# Altium PCB PCB_PLC_Khanh.PcbDoc
Units mm, origin at the board's own origin, x right, y up, seen from the top; angles counter-clockwise.
Board outline 123 x 88 mm, 2 copper layers (Top Layer, Bottom Layer); 168 components, 154 nets, 553 pads, 0 vias.
Unrouted connection lines stored in the file: 311.
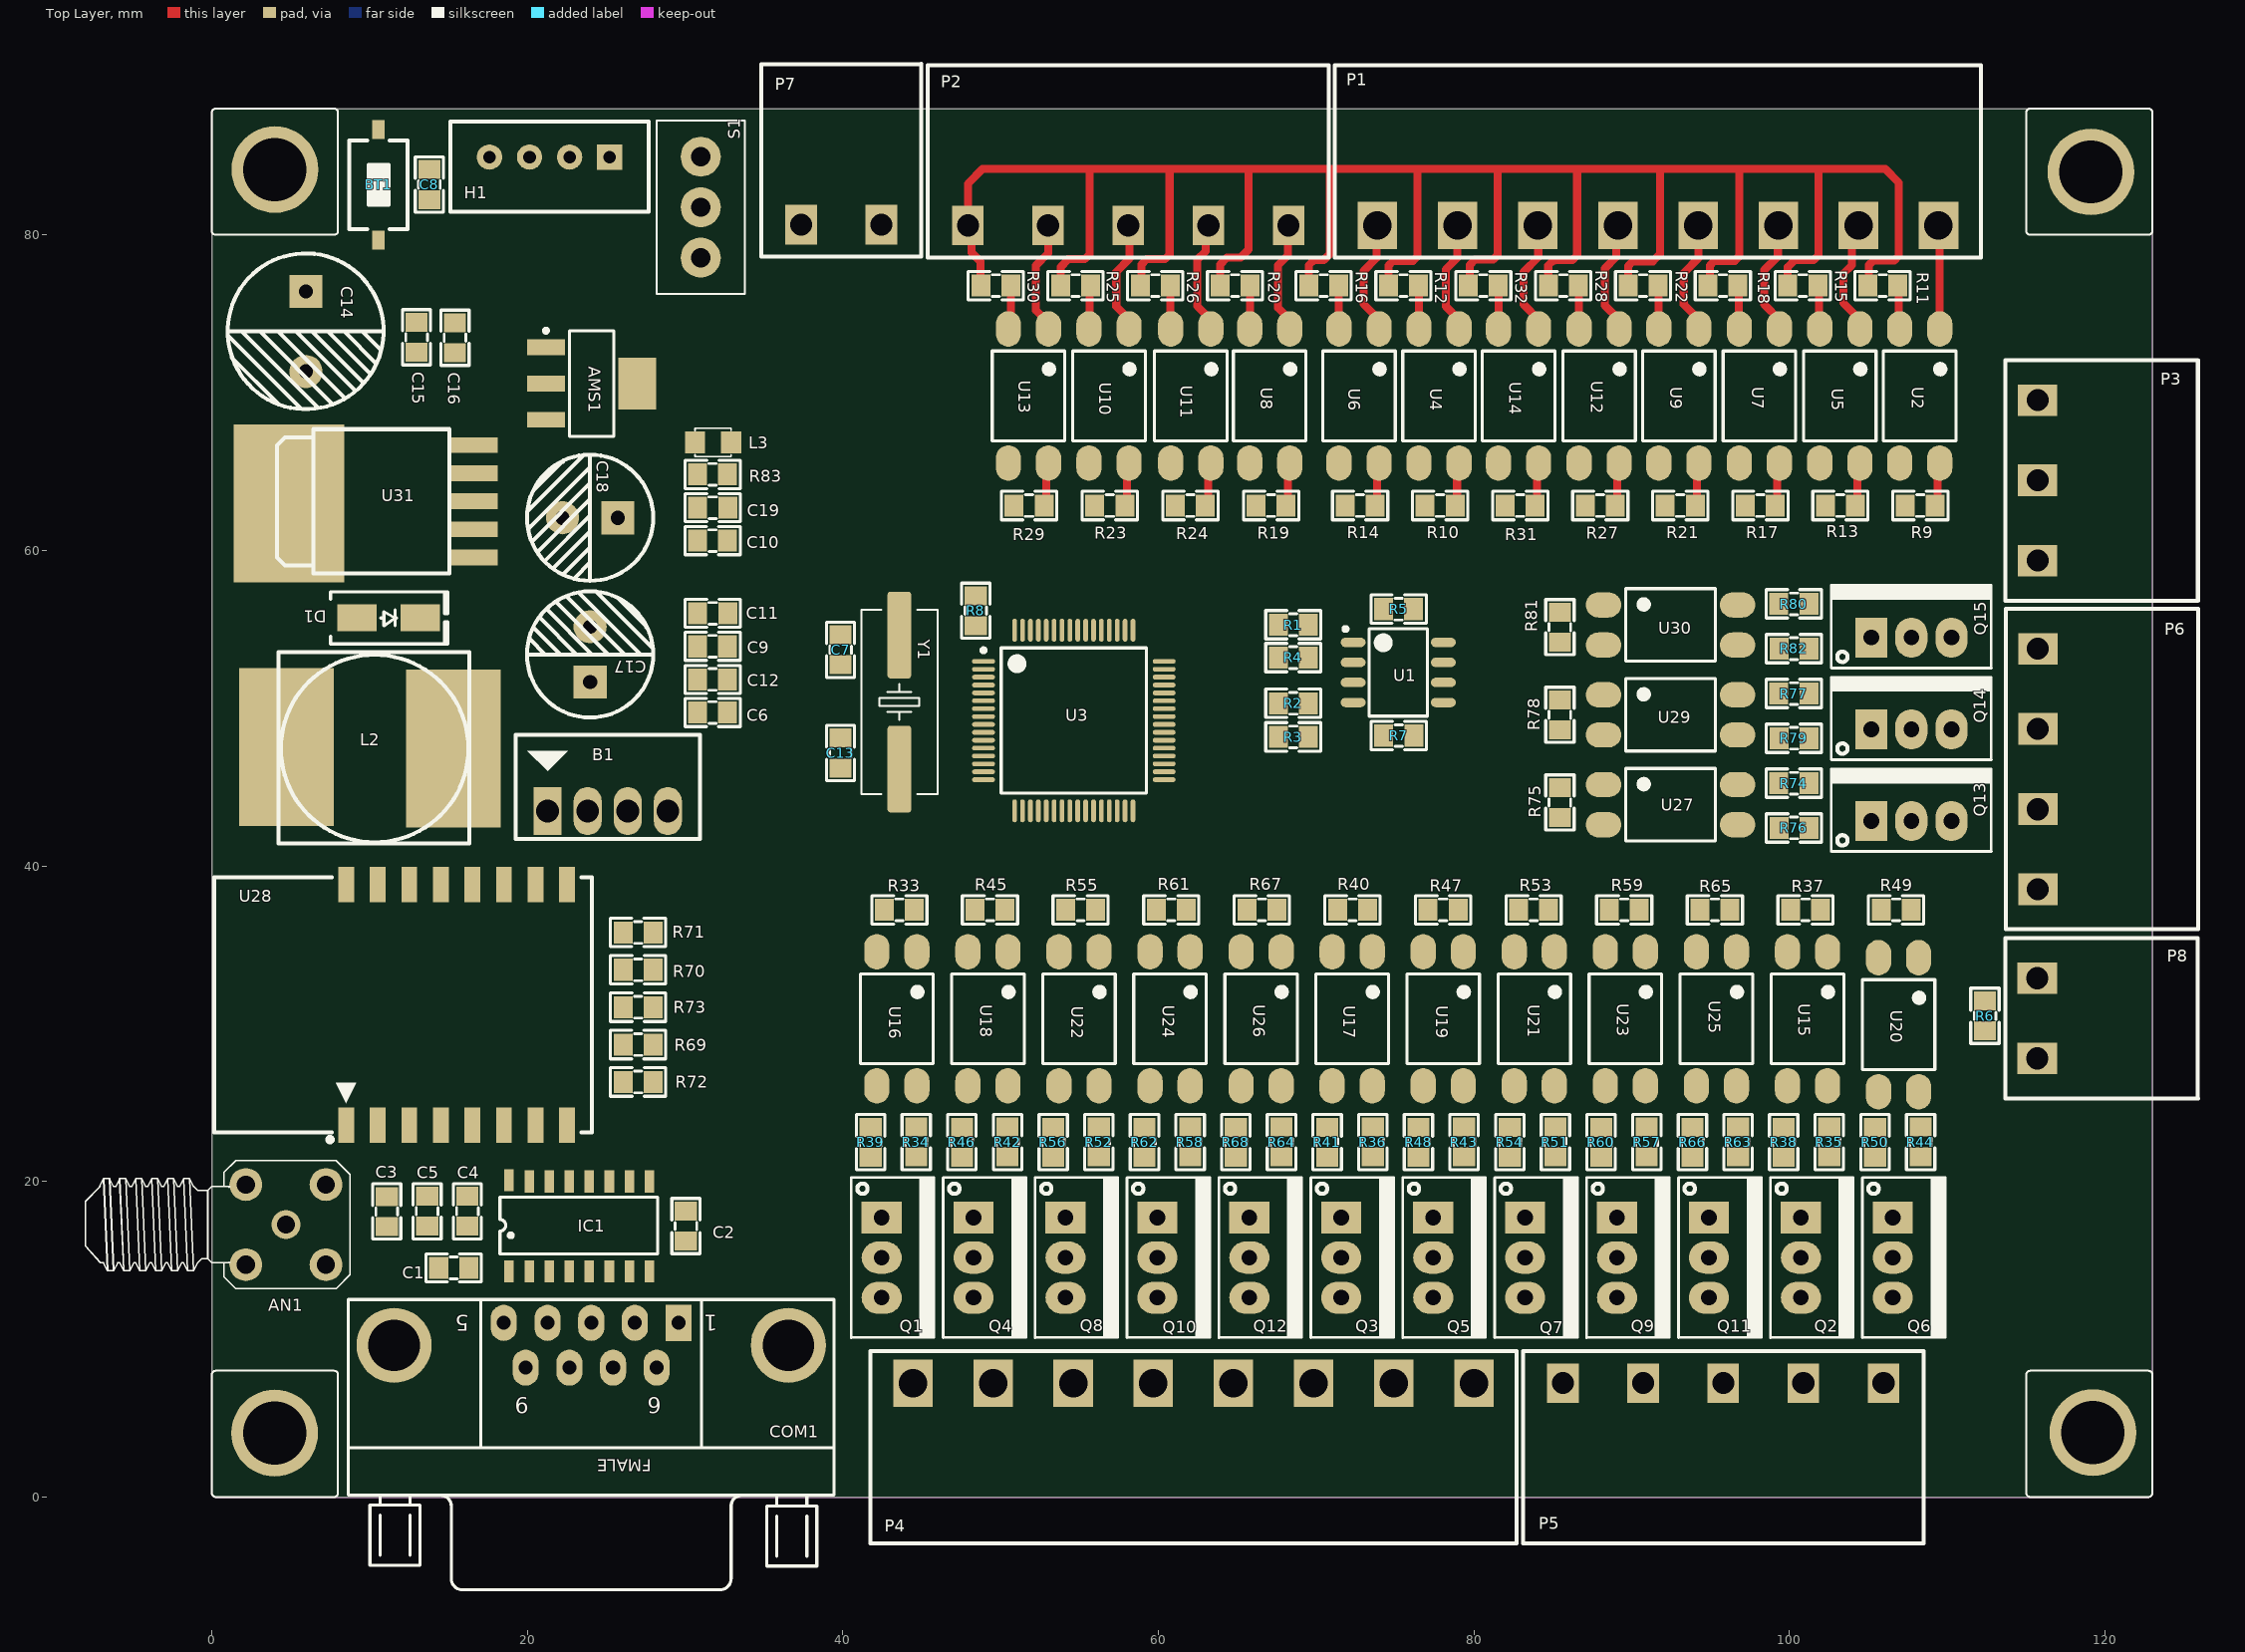
[diagram p0: Top Layer view]
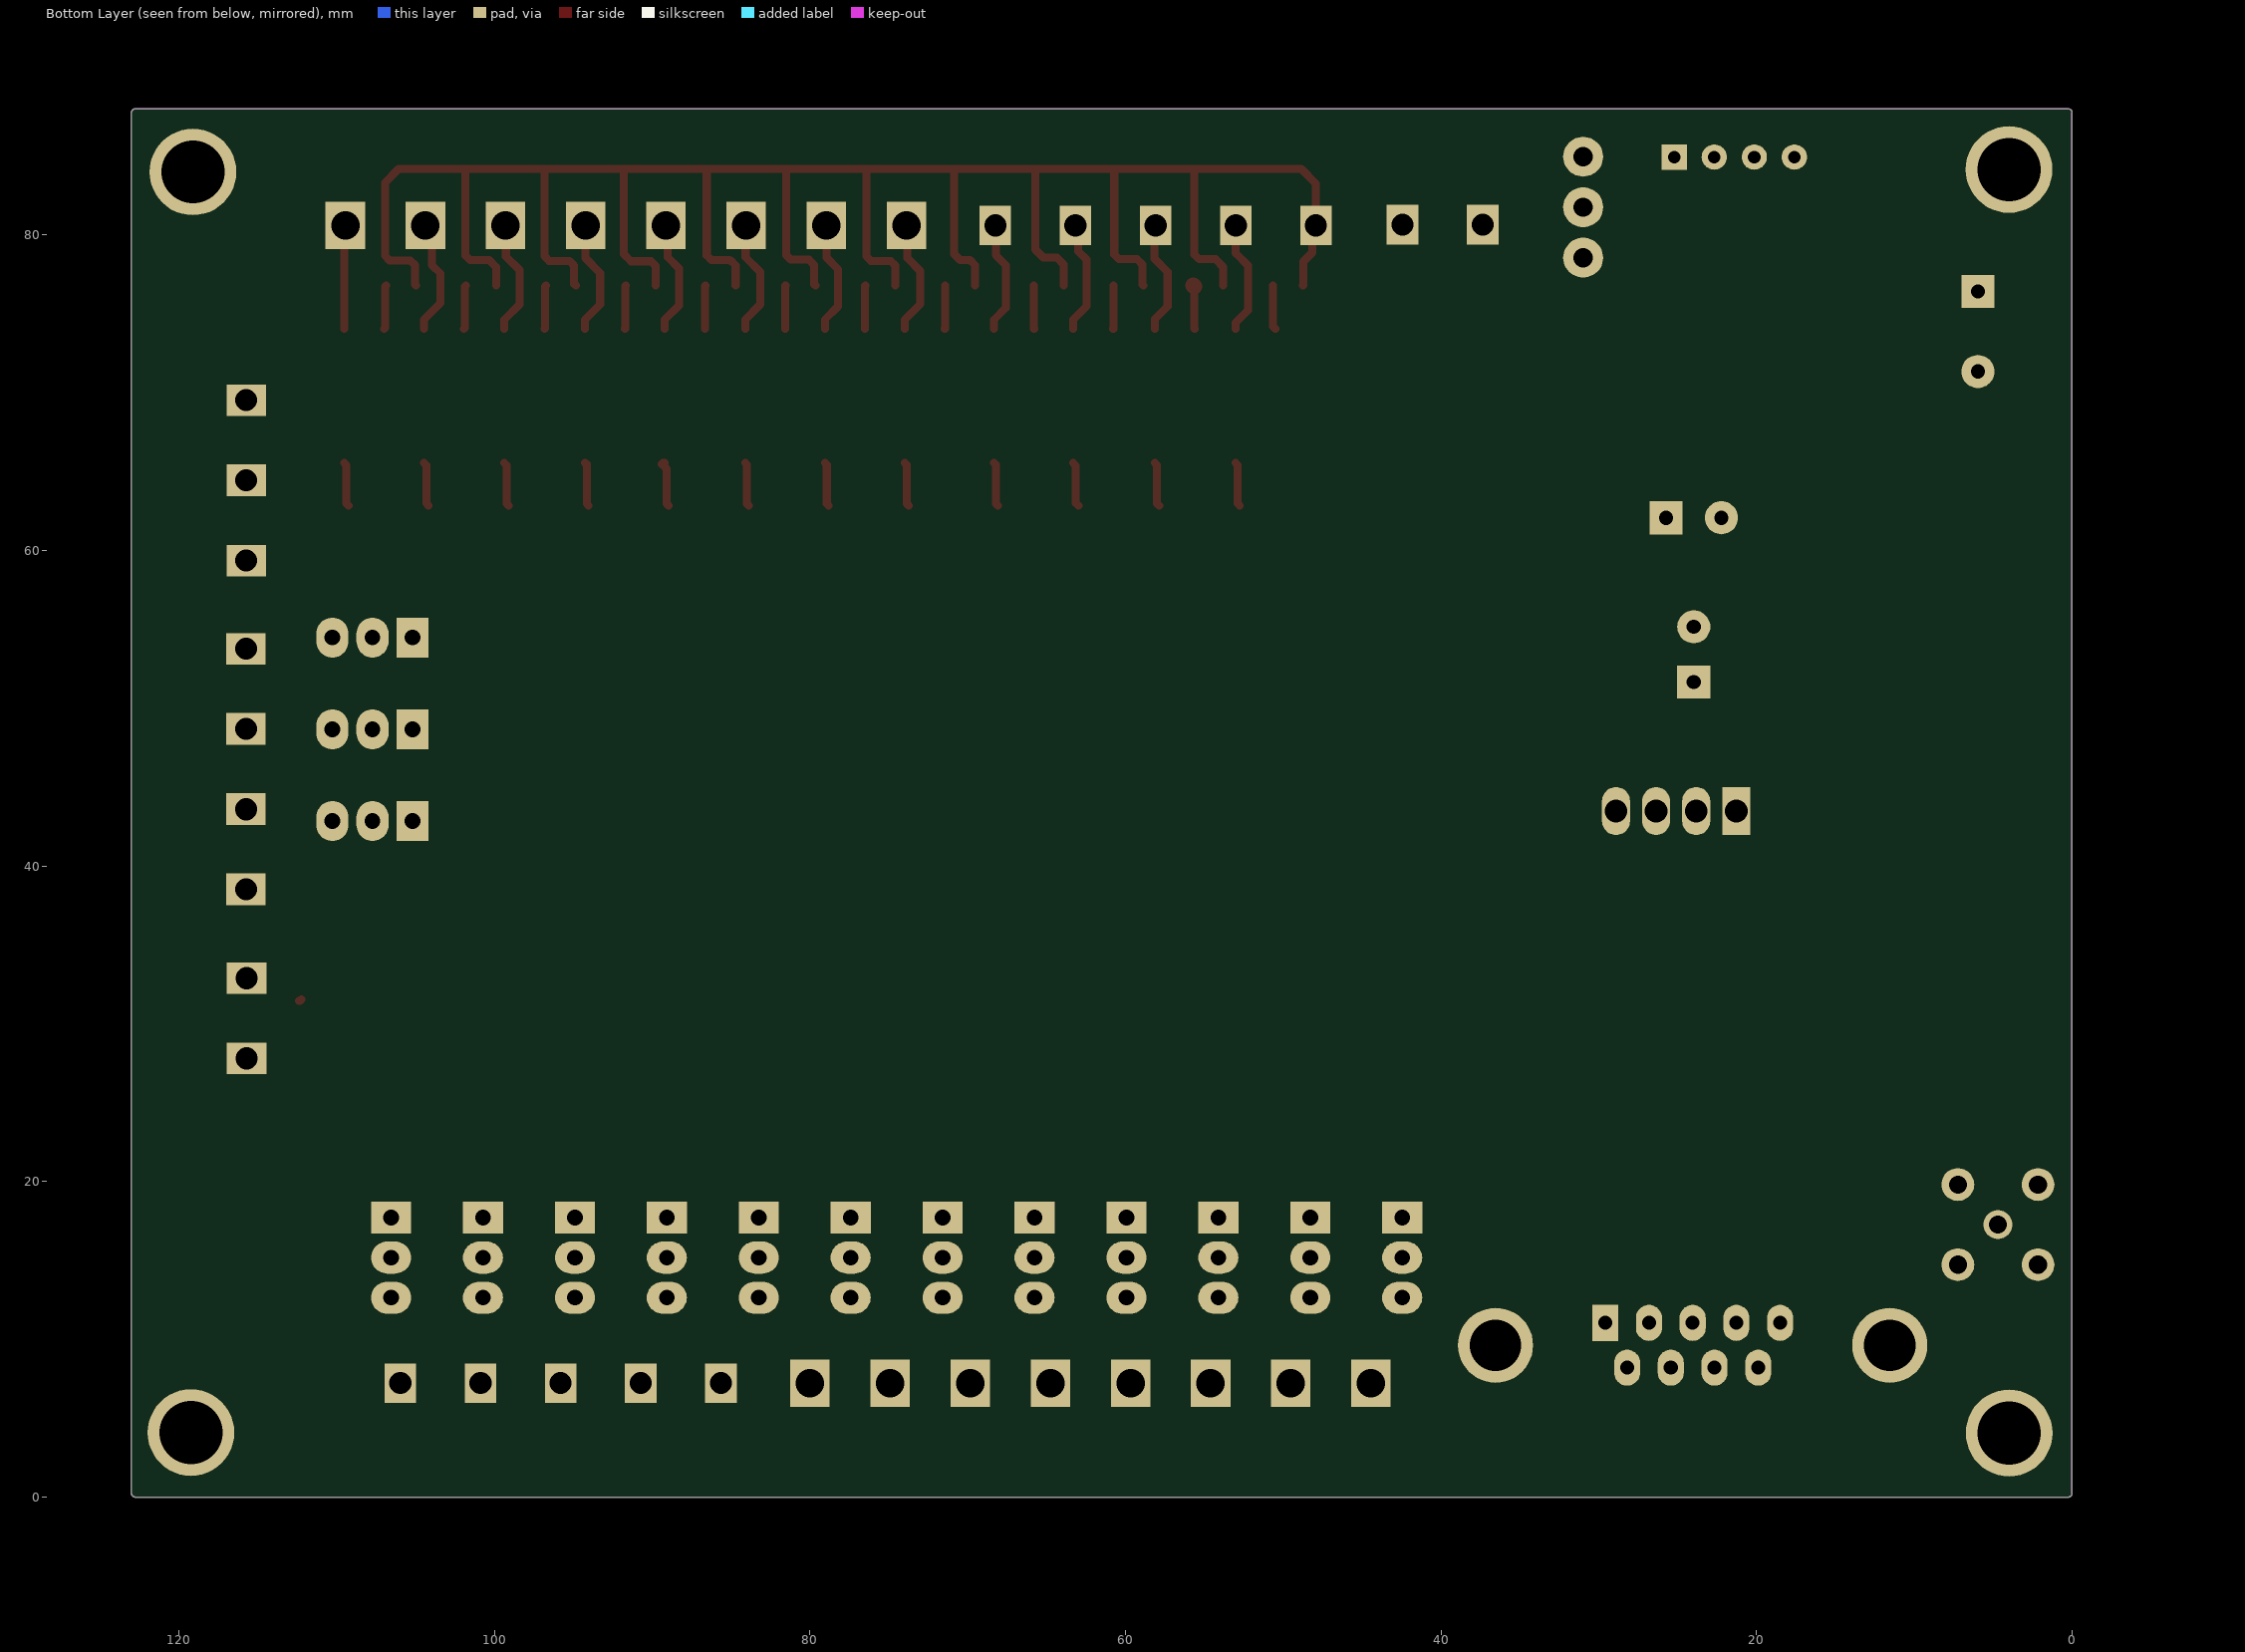
[diagram p1: Bottom Layer view, seen from below]

## Layer stack, top to bottom
Top Solder: solder mask 0.0102, Solder Resist, Dk 3.5
Top Layer: signal copper 0.0356
Dielectric 1: dielectric 0.32, FR-4, Dk 4.8
Bottom Layer: signal copper 0.0356
Bottom Solder: solder mask 0.0102, Solder Resist, Dk 3.5

## Board outline
0,0.254 0,87.746 cw(c0.254,87.746) 0.254,88 122.746,88 cw(c122.746,87.746) 123,87.746 123,0.254 cw(c122.746,0.254) 122.746,0 0.254,0 cw(c0.254,0.254)

## Design rules (kind name [scope] priority, off if disabled: settings)
Clearance [All] p1: gap=0.254 ignorepadtopadclearanceinfootprint=FALSE except(0: Arc-Hole Track-Hole SMDPad-Hole THPad-Hole Via-Hole Fill-Hole Poly-Hole Region-Hole Text-Hole)
PolygonConnect [All] p1: connectstyle=Relief reliefconductorwidth=0.254 reliefentries=4 polygonreliefangle="90 Angle" airgapwidth=0.254
RoomDefinition U_WIFI [InComponentClass('U_WIFI')] p1: confinementstyle=ConfineIn formatcopy=TRUE lockcomponents=FALSE outline -41.478,-32.36 9.322,-32.36 9.322,-6.96 -41.478,-6.96
RoomDefinition U_RS485 [InComponentClass('U_RS485')] p2: confinementstyle=ConfineIn formatcopy=TRUE lockcomponents=FALSE outline -41.478,-32.36 9.322,-32.36 9.322,-6.96 -41.478,-6.96
RoomDefinition U_RS232 [InComponentClass('U_RS232')] p3: confinementstyle=ConfineIn formatcopy=TRUE lockcomponents=FALSE outline -41.478,-32.36 9.322,-32.36 9.322,-6.96 -41.478,-6.96
RoomDefinition U_PWM_Output [InComponentClass('U_PWM_Output')] p4: confinementstyle=ConfineIn formatcopy=TRUE lockcomponents=FALSE outline -41.478,-32.36 9.322,-32.36 9.322,-6.96 -41.478,-6.96
RoomDefinition U_Power [InComponentClass('U_Power')] p5: confinementstyle=ConfineIn formatcopy=TRUE lockcomponents=FALSE outline -41.478,-32.36 9.322,-32.36 9.322,-6.96 -41.478,-6.96
RoomDefinition U_D_Output [InComponentClass('U_D_Output')] p6: confinementstyle=ConfineIn formatcopy=TRUE lockcomponents=FALSE outline -41.478,-32.36 9.322,-32.36 9.322,-6.96 -41.478,-6.96
RoomDefinition U_D_Input [InComponentClass('U_D_Input')] p7: confinementstyle=ConfineIn formatcopy=TRUE lockcomponents=FALSE outline -41.478,-32.36 9.322,-32.36 9.322,-6.96 -41.478,-6.96
RoomDefinition U_A_Input [InComponentClass('U_A_Input')] p8: confinementstyle=ConfineIn formatcopy=TRUE lockcomponents=FALSE outline -41.478,-32.36 9.322,-32.36 9.322,-6.96 -41.478,-6.96
RoomDefinition SCH_PLC_Khanh [InComponentClass('SCH_PLC_Khanh')] p9: confinementstyle=ConfineIn formatcopy=TRUE lockcomponents=FALSE outline -41.478,-32.36 9.322,-32.36 9.322,-6.96 -41.478,-6.96
RoutingVias [All] p1: holewidth=0.381 width=0.762 viastyle="Through Hole" minholewidth=0.254 minwidth=0.508 maxholewidth=0.711 maxwidth=1.27
SolderMaskExpansion [All] p1: expansion=0.102 istentingtop=FALSE
Width [All] p1: maxlimit=1.016 minlimit=0.254 preferedwidth=0.508
30 further rules are at their usual default settings.

## Classes and differential pairs
component class U_WIFI: AN1 R69 R70 R71 R72 R73 U28
component class U_RS485: C6 P8 R1 R2 R3 R4 R5 R6 R7 U1
component class U_RS232: C1 C2 C3 C4 C5 COM1 IC1
component class U_PWM_Output: P6 Q13 Q14 Q15 R74 R75 R76 R77 R78 R79 R80 R81 R82 U27 U29 U30
component class U_Power: AMS1 B1 C14 C15 C16 C17 C18 C19 D1 L2 L3 P7 R83 S1 U31
component class U_D_Output: P4 P5 Q1 Q2 Q3 Q4 Q5 Q6 Q7 Q8 Q9 Q10 Q11 Q12 R33 R34 R35 R36 R37 R38 R39 R40 R41 R42 R43 R44 R45 R46 R47 R48 R49 R50 R51 R52 R53 R54 R55 R56 R57 R58 R59 R60 R61 R62 R63 R64 R65 R66 R67 R68 U15 U16 U17 U18 U19 U20 U21 U22 U23 U24 U25 U26
component class U_D_Input: P1 P2 R9 R10 R11 R12 R13 R14 R15 R16 R17 R18 R19 R20 R21 R22 R23 R24 R25 R26 R27 R28 R29 R30 R31 R32 U2 U4 U5 U6 U7 U8 U9 U10 U11 U12 U13 U14
component class U_A_Input: P3
component class SCH_PLC_Khanh: BT1 C7 C8 C9 C10 C11 C12 C13 H1 R8 U3 Y1

## Components (designator, comment, footprint, x,y, rotation, side; value= is the part's Value field where it differs from the comment)
AMS1 "AMS1117-3.3V" SOT223 24.079,70.587 r270 top value="AMS1117-3.3V SOT223"
AN1 "ANTENA" "DE ANTEN SMA CONG" 4.699,17.272 r270 top
B1 "B0505S" B0505S 21.285,43.485 r0 top
BT1 "Nut Nhan 2 Chan SMD 3x6x2.5" "Nut Nhan 2 Chan SMD 3x6x2.5" 10.566,83.185 r270 top
C1 "104" "tu 0805" 15.336,14.525 r180 top
C2 "104" "tu 0805" 30.052,17.185 r270 top
C3 "104" "tu 0805" 11.096,18.115 r270 top
C4 "104" "tu 0805" 16.198,18.115 r90 top
C5 "104" "tu 0805" 13.647,18.115 r90 top
C6 "104" "tu 0805" 31.744,49.73 r180 top
C7 "22pF" "tu 0805" 39.849,53.701 r90 top
C8 "104" "tu 0805" 13.789,83.191 r90 top
C9 "104" "tu 0805" 31.744,53.924 r180 top
C10 "104" "tu 0805" 31.744,60.627 r180 top
C11 "104" "tu 0805" 31.744,56.021 r0 top
C12 "104" "tu 0805" 31.744,51.827 r180 top
C13 "22pF" "tu 0805" 39.849,47.168 r270 top
C14 "470uF" "tu hoa 10mm" 5.969,73.889 r270 top
C15 "104" "tu 0805" 12.976,73.513 r90 top
C16 "104" "tu 0805" 15.414,73.488 r90 top
C17 "470uF" "tu hoa 8mm" 23.978,53.414 r90 top
C18 "470uF" "tu hoa 8mm" 23.978,62.078 r180 top
C19 "104" "tu 0805" 31.744,62.719 r0 top
COM1 "COM 9 FMALE" "DSB 9-F" 24.048,9.625 r180 top value="COM 9"
D1 "SS34" "DIODE SMA" 11.208,55.728 r0 top
H1 "Header 4P 2.54 Duc Thang" XH2.54M-4 25.222,84.938 r180 top
IC1 "MAX232" SO-G16 23.292,17.154 r0 top
L2 "100uH - 3A SMD" "Cuon Cam 12x12x10" 16.324,41.449 r90 top
L3 "LED 0805" LED-0805-Orange 30.628,66.853 r0 top
P1 "CON 8 EDG5.08" "CON 8 8EDG5.08" 91.664,80.601 r0 top
P2 "CON 5 EDG5.08" "CON 5 5EDG5.08" 47.925,80.601 r0 top
P3 "CON 3 EDG5.08" "CON 3 3EDG5.08" 115.722,69.532 r270 top
P4 "CON 8 EDG5.08" "CON 8 8EDG5.08" 62.217,7.231 r180 top
P5 "CON 5 EDG5.08" "CON 5 5EDG5.08" 105.956,7.231 r180 top
P6 "CON 4 EDG5.08" "CON 4 4EDG5.08" 115.735,53.772 r270 top
P7 "CON 2 EDG5.08" "CON 2 2EDG5.08" 37.359,80.652 r0 top
P8 "CON 2 EDG5.08" "CON 2 2EDG5.08" 115.697,32.893 r270 top
Q1 "IRFZ44" TO220 42.458,17.721 r270 top
Q2 "IRFZ44" TO220 100.719,17.721 r270 top
Q3 "IRFZ44" TO220 71.588,17.721 r270 top
Q4 "IRFZ44" TO220 48.284,17.721 r270 top
Q5 "IRFZ44" TO220 77.414,17.721 r270 top
Q6 "IRFZ44" TO220 106.545,17.721 r270 top
Q7 "IRFZ44" TO220 83.241,17.721 r270 top
Q8 "IRFZ44" TO220 54.11,17.721 r270 top
Q9 "IRFZ44" TO220 89.067,17.721 r270 top
Q10 "IRFZ44" TO220 59.936,17.721 r270 top
Q11 "IRFZ44" TO220 94.893,17.721 r270 top
Q12 "IRFZ44" TO220 65.762,17.721 r270 top
Q13 "IRFZ44" TO220 105.181,42.85 r0 top
Q14 "IRFZ44" TO220 105.181,48.666 r0 top
Q15 "IRFZ44" TO220 105.181,54.483 r0 top
R1 "10k" "tro smd 0805" 68.549,55.235 r180 top
R2 "10k" "tro smd 0805" 68.549,50.257 r180 top
R3 "10k" "tro smd 0805" 68.549,48.123 r180 top
R4 "10k" "tro smd 0805" 68.549,53.152 r180 top
R5 "20k" "tro smd 0805" 75.224,56.226 r180 top
R6 "120R" "tro smd 0805" 112.446,30.505 r270 top
R7 "20k" "tro smd 0805" 75.235,48.209 r180 top
R8 "220R" "tro smd 0805" 48.362,56.185 r90 top
R9 "10k" "tro smd 0805" 108.295,62.785 r180 top
R10 "10k" "tro smd 0805" 77.858,62.785 r180 top
R11 "10k" "tro smd 0805" 105.899,76.852 r0 top
R12 "10k" "tro smd 0805" 75.527,76.852 r0 top
R13 "10k" "tro smd 0805" 103.222,62.785 r180 top
R14 "10k" "tro smd 0805" 72.786,62.785 r180 top
R15 "10k" "tro smd 0805" 100.837,76.852 r0 top
R16 "10k" "tro smd 0805" 70.466,76.852 r0 top
R17 "10k" "tro smd 0805" 98.149,62.785 r180 top
R18 "10k" "tro smd 0805" 95.775,76.852 r0 top
R19 "10k" "tro smd 0805" 67.147,62.785 r180 top
R20 "10k" "tro smd 0805" 64.852,76.852 r0 top
R21 "10k" "tro smd 0805" 93.077,62.785 r180 top
R22 "10k" "tro smd 0805" 90.713,76.852 r0 top
R23 "10k" "tro smd 0805" 56.919,62.785 r180 top
R24 "10k" "tro smd 0805" 62.033,62.785 r180 top
R25 "10k" "tro smd 0805" 54.743,76.852 r0 top
R26 "10k" "tro smd 0805" 59.798,76.852 r0 top
R27 "10k" "tro smd 0805" 88.004,62.785 r180 top
R28 "10k" "tro smd 0805" 85.651,76.852 r0 top
R29 "10k" "tro smd 0805" 51.805,62.785 r180 top
R30 "10k" "tro smd 0805" 49.688,76.852 r0 top
R31 "10k" "tro smd 0805" 82.931,62.785 r180 top
R32 "10k" "tro smd 0805" 80.589,76.852 r0 top
R33 "680R" "tro smd 0805" 43.581,37.285 r0 top
R34 "10k" "tro smd 0805" 44.584,22.502 r90 top
R35 "10k" "tro smd 0805" 102.456,22.502 r90 top
R36 "10k" "tro smd 0805" 73.525,22.502 r90 top
R37 "680R" "tro smd 0805" 101.008,37.285 r0 top
R38 "100R" "tro smd 0805" 99.689,22.502 r270 top
R39 "100R" "tro smd 0805" 41.817,22.502 r270 top
R40 "680R" "tro smd 0805" 72.295,37.285 r0 top
R41 "100R" "tro smd 0805" 70.758,22.502 r270 top
R42 "10k" "tro smd 0805" 50.372,22.502 r90 top
R43 "10k" "tro smd 0805" 79.313,22.502 r90 top
R44 "10k" "tro smd 0805" 108.244,22.502 r90 top
R45 "680R" "tro smd 0805" 49.324,37.285 r0 top
R46 "100R" "tro smd 0805" 47.605,22.502 r270 top
R47 "680R" "tro smd 0805" 78.037,37.285 r0 top
R48 "100R" "tro smd 0805" 76.546,22.502 r270 top
R49 "680R" "tro smd 0805" 106.751,37.285 r0 top
R50 "100R" "tro smd 0805" 105.477,22.502 r270 top
R51 "10k" "tro smd 0805" 85.101,22.502 r90 top
R52 "10k" "tro smd 0805" 56.16,22.502 r90 top
R53 "680R" "tro smd 0805" 83.78,37.285 r0 top
R54 "100R" "tro smd 0805" 82.334,22.502 r270 top
R55 "680R" "tro smd 0805" 55.066,37.285 r0 top
R56 "100R" "tro smd 0805" 53.393,22.502 r270 top
R57 "10k" "tro smd 0805" 90.889,22.502 r90 top
R58 "10k" "tro smd 0805" 61.948,22.502 r90 top
R59 "680R" "tro smd 0805" 89.523,37.285 r0 top
R60 "100R" "tro smd 0805" 88.122,22.502 r270 top
R61 "680R" "tro smd 0805" 60.809,37.285 r0 top
R62 "100R" "tro smd 0805" 59.181,22.502 r270 top
R63 "10k" "tro smd 0805" 96.677,22.502 r90 top
R64 "10k" "tro smd 0805" 67.736,22.502 r90 top
R65 "680R" "tro smd 0805" 95.265,37.285 r0 top
R66 "100R" "tro smd 0805" 93.91,22.502 r270 top
R67 "680R" "tro smd 0805" 66.552,37.285 r0 top
R68 "100R" "tro smd 0805" 64.969,22.502 r270 top
R69 "10k" "tro smd 0805" 27.02,28.618 r180 top
R70 "10k" "tro smd 0805" 27.02,33.485 r0 top
R71 "10k" "tro smd 0805" 27.02,35.728 r180 top
R72 "10k" "tro smd 0805" 27.02,26.375 r0 top
R73 "10k" "tro smd 0805" 27.02,31.115 r0 top
R74 "10k" "tro smd 0805" 100.279,45.193 r180 top
R75 "680R" "tro smd 0805" 85.385,44.029 r90 top
R76 "100R" "tro smd 0805" 100.279,42.479 r0 top
R77 "10k" "tro smd 0805" 100.279,50.874 r180 top
R78 "680R" "tro smd 0805" 85.385,49.586 r90 top
R79 "100R" "tro smd 0805" 100.279,48.16 r0 top
R80 "10k" "tro smd 0805" 100.279,56.556 r180 top
R81 "680R" "tro smd 0805" 85.385,55.143 r90 top
R82 "100R" "tro smd 0805" 100.279,53.842 r0 top
R83 "220R" "tro smd 0805" 31.742,64.887 r0 top
S1 "ON-ON" SWITCH_SPDT_SLIDER 30.988,81.761 r270 top
U1 "max485_smd" SO8W_N 75.26,52.273 r0 top
U2 "OPTO PC817 SMD" SOP4 108.25,69.798 r270 top value=PC817
U3 "STM32F103xx_LQFP64" STM32_LQFP64 54.635,49.225 r0 top
U4 "OPTO PC817 SMD" SOP4 77.781,69.798 r270 top value=PC817
U5 "OPTO PC817 SMD" SOP4 103.188,69.798 r270 top value=PC817
U6 "OPTO PC817 SMD" SOP4 72.715,69.798 r270 top value=PC817
U7 "OPTO PC817 SMD" SOP4 98.09,69.798 r270 top value=PC817
U8 "OPTO PC817 SMD" SOP4 67.051,69.798 r270 top value=PC817
U9 "OPTO PC817 SMD" SOP4 92.985,69.798 r270 top value=PC817
U10 "OPTO PC817 SMD" SOP4 56.866,69.798 r270 top value=PC817
U11 "OPTO PC817 SMD" SOP4 62.047,69.798 r270 top value=PC817
U12 "OPTO PC817 SMD" SOP4 87.93,69.798 r270 top value=PC817
U13 "OPTO PC817 SMD" SOP4 51.76,69.798 r270 top value=PC817
U14 "OPTO PC817 SMD" SOP4 82.825,69.798 r270 top value=PC817
U15 "OPTO PC817 SMD" SOP4 101.138,30.319 r270 top value=PC817
U16 "OPTO PC817 SMD" SOP4 43.422,30.319 r270 top value=PC817
U17 "OPTO PC817 SMD" SOP4 72.28,30.319 r270 top value=PC817
U18 "OPTO PC817 SMD" SOP4 49.193,30.319 r270 top value=PC817
U19 "OPTO PC817 SMD" SOP4 78.051,30.319 r270 top value=PC817
U20 "OPTO PC817 SMD" SOP4 106.909,29.947 r270 top value=PC817
U21 "OPTO PC817 SMD" SOP4 83.823,30.319 r270 top value=PC817
U22 "OPTO PC817 SMD" SOP4 54.965,30.319 r270 top value=PC817
U23 "OPTO PC817 SMD" SOP4 89.594,30.319 r270 top value=PC817
U24 "OPTO PC817 SMD" SOP4 60.736,30.319 r270 top value=PC817
U25 "OPTO PC817 SMD" SOP4 95.366,30.319 r270 top value=PC817
U26 "OPTO PC817 SMD" SOP4 66.508,30.319 r270 top value=PC817
U27 "OPTO PC817 SMD" SOP4 92.456,43.891 r0 top value=PC817
U28 "ESP 07" "ESP8266 07" 8.516,23.212 r90 top
U29 "OPTO PC817 SMD" SOP4 92.456,49.587 r0 top value=PC817
U30 "OPTO PC817 SMD" SOP4 92.456,55.283 r0 top value=PC817
U31 "LM2576HVS 5.0V SMD" TO263-5 10.744,63.119 r90 top
Y1 "8Mhz" "Thach Anh 2 chan SMD" 43.581,50.395 r90 top value=4Mhz

## Footprints (in the part's own frame and the unit in brackets; to place one, negate y for a bottom-side part, rotate by r counter-clockwise, add the part's x,y. Pads: shape width x height; smd on the part's side, far side on the other; paste and mask are expansions set on the pad)
B0505S [mil]
  rect 70x120 hole 57: 1(0,0)
  oval 70x120 hole 57: 2(100,0) 3(200,0) 4(300,0)
  silkscreen extent -80,-70 380,190, body extent -76,-50 376,186, height 394
"CON 2 2EDG5.08" [mm]
  rect 2x2.5 hole 1.4: 1(0,0) 2(5.08,0)
  silkscreen extent -2.54,-2.03 7.62,10.21, body extent -2.5,-1.75 7.58,10.25, height 3.15
"CON 3 3EDG5.08" [mm]
  rect 2x2.5 hole 1.4: 1(0,0) 2(5.08,0) 3(10.173,0)
  silkscreen extent -2.54,-2.03 12.71,10.16, body extent -2.5,-1.75 12.67,10.25, height 3.15
"CON 4 4EDG5.08" [mm]
  rect 2x2.5 hole 1.4: 1(0,0) 1(0,0) 2(5.08,0) 2(5.08,0) 3(10.16,0) 3(10.173,0) 4(15.24,0)
  silkscreen extent -2.54,-2.03 17.78,10.17, body extent -2.5,-1.75 17.74,10.25, height 3.15
"CON 5 5EDG5.08" [mm]
  rect 2x2.5 hole 1.4: 1(0,0) 2(5.08,0) 3(10.16,0) 4(15.24,0) 5(20.32,0)
  silkscreen extent -2.54,-2.03 22.86,10.16, body extent -2.5,-1.75 22.82,10.25, height 3.15
"CON 8 8EDG5.08" [mm]
  rect 2.5x3 hole 1.8: 1(-17.78,0) 2(-12.7,0) 3(-7.62,0) 4(-2.54,0) 5(2.54,0) 6(7.62,0) 7(12.7,0) 8(17.78,0)
  silkscreen extent -20.48,-2.03 20.48,10.16, body extent -20.28,-1.75 20.28,10.25, height 3.15
"Cuon Cam 12x12x10" [mm] "Cuon Cam 12x12x10"
  rect 10x6 smd: 1(6.1,11.6) 2(6,1)
  silkscreen extent 0,0 12.1,12.1, body extent 0.1,-0.2 12.1,12.14, height 7.51
"DE ANTEN SMA CONG" [mil]
  round 72 hole 45: 1(0,0)
  round 82 hole 45: 2(-100,-100) 3(100,-100) 4(100,100) 5(-100,100)
  silkscreen extent -160,-500 160,160, body extent -137,-457 139,137, height 394
"DIODE SMA" [mm] "SMA"
  rect 2.5x1.7 smd: 1(-2,0) 2(2,0)
  silkscreen extent -3.68,-1.65 3.75,1.65, body extent -2.6,-1.37 2.6,1.37, height 2.4
"DSB 9-F" [mil] "COM FMALE - D Subminiature; 9 Position; Right Angle; Pitch 1.385 mm"
  rect 65x90 hole 35: 1(-218.11,-55.91)
  oval 65x90 hole 35: 2(-109.05,-55.91) 3(0,-55.91) 4(109.06,-55.91) 5(218.11,-55.91) 6(-163.58,55.91) 7(-54.53,55.91) 8(54.53,55.91) 9(163.58,55.91)
  round 187.4 hole 128.35: 10(-491.93,0) 11(491.93,0)
  silkscreen extent -606,-114 606,610, body extent -604,-138 608,613, height 495
"ESP8266 07" [mm] "ESP-12 Wi-Fi Module by AI-Thinker"
  rect 2.25x1 smd: 1(0.375,0) 2(0.375,-2) 3(0.375,-4) 4(0.375,-6) 5(0.375,-8) 6(0.375,-10) 7(0.375,-12) 8(0.375,-14) 9(15.625,-14) 10(15.625,-12) 11(15.625,-10) 12(15.625,-8) 13(15.625,-6) 14(15.625,-4) 15(15.625,-2) 16(15.625,0)
  silkscreen extent -0.7,-15.57 16.08,8.37, body extent 0,-15.49 16,8.51, height 2.75
LED-0805-Orange [mil]
  rect 50x55 smd: 1(0,0) 2(90,0)
  silkscreen extent 0,-35 90,35, body extent 5,-25 85,25, height 43
"Nut Nhan 2 Chan SMD 3x6x2.5" [mm] "Switch SMD type"
  rect 1.2x0.8 smd: 1(-3.5,0) 2(3.5,0)
  silkscreen extent -2.82,-1.85 2.82,1.85, body extent -3.05,-1.85 3.05,1.85, height 2.5
SO8W_N [mil] "SOP, 8-Leads, Body 5.3x5.3mm, Pitch 1.27mm, IPC Medium Density"
  oval 62x23.62 smd: 1(-115,75) 2(-115,25) 3(-115,-25) 4(-115,-75) 5(110,-75) 6(110,-25) 7(110,25) 8(110,75)
  silkscreen extent -139,-109 70,113, body extent -123,-96 113,96, height 69
SO-G16 [mil] "Small Outline; 16 Leads; Body Width 3.9 mm; Pitch 1.27 mm"
  rect 23.62x55 smd: 1(-175,-112.36) 2(-125,-112.36) 3(-75,-112.36) 4(-25,-112.36) 5(25,-112.36) 6(75,-112.36) 7(125,-112.36) 8(175,-112.36) 9(175,112.36) 10(125,112.36) 11(75,112.36) 12(25,112.36) 13(-25,112.36) 14(-75,112.36) 15(-125,112.36) 16(-175,115)
  silkscreen extent -198,-68 196,73, body extent -195,-116 195,120, height 69
SOP4 [mm]
  oval 2.25x1.6 smd: 1(-4.25,1.27) 2(-4.25,-1.27) 3(4.25,-1.27) 4(4.25,1.27)
  silkscreen extent -2.85,-2.3 2.85,2.3, body extent -4.67,-2.29 4.93,2.31, height 3.6
SOT223 [mm]
  rect 1x2.4 smd: 1(-2.3,-2.9) 2(0,-2.9) 3(2.3,-2.9)
  rect 3.3x2.4 smd: 4(0,2.9)
  silkscreen extent -3.47,-3.02 3.35,1.4, body extent -3.25,-3.56 3.25,3.4, height 1.68
STM32_LQFP64 [mm] "TSQFP, 64-Leads, Body 10.00x10.00mm, Pitch 0.50mm, IPC Medium Density"
  oval 1.45x0.3 smd: 1(-5.725,3.75) 2(-5.725,3.25) 3(-5.725,2.75) 4(-5.725,2.25) 5(-5.725,1.75) 6(-5.725,1.25) 7(-5.725,0.75) 8(-5.725,0.25) 9(-5.725,-0.25) 10(-5.725,-0.75) 11(-5.725,-1.25) 12(-5.725,-1.75) 13(-5.725,-2.25) 14(-5.725,-2.75) 15(-5.725,-3.25) 16(-5.725,-3.75) 33(5.725,-3.75) 34(5.725,-3.25) 35(5.725,-2.75) 36(5.725,-2.25) 37(5.725,-1.75) 38(5.725,-1.25) 39(5.725,-0.75) 40(5.725,-0.25) 41(5.725,0.25) 42(5.725,0.75) 43(5.725,1.25) 44(5.725,1.75) 45(5.725,2.25) 46(5.725,2.75) 47(5.725,3.25) 48(5.725,3.75)
  oval 0.3x1.45 smd: 17(-3.75,-5.725) 18(-3.25,-5.725) 19(-2.75,-5.725) 20(-2.25,-5.725) 21(-1.75,-5.725) 22(-1.25,-5.725) 23(-0.75,-5.725) 24(-0.25,-5.725) 25(0.25,-5.725) 26(0.75,-5.725) 27(1.25,-5.725) 28(1.75,-5.725) 29(2.25,-5.725) 30(2.75,-5.725) 31(3.25,-5.725) 32(3.75,-5.725) 49(3.75,5.725) 50(3.25,5.725) 51(2.75,5.725) 52(2.25,5.725) 53(1.75,5.725) 54(1.25,5.725) 55(0.75,5.725) 56(0.25,5.725) 57(-0.25,5.725) 58(-0.75,5.725) 59(-1.25,5.725) 60(-1.75,5.725) 61(-2.25,5.725) 62(-2.75,5.725) 63(-3.25,5.725) 64(-3.75,5.725)
  silkscreen extent -5.85,-4.6 4.6,4.6, body extent -6,-6 6,6, height 1.6
SWITCH_SPDT_SLIDER [mil] "TE Connectivity SLS121PC04 SPDT slider"
  round 100 hole 48: 1(-126,0) 2(0,0) 3(126,0)
  silkscreen extent -217,-110 217,110, body extent -216,-110 217,110, height 394
"Thach Anh 2 chan SMD" [mm] "SMD Crystal HC49/US-SM package"
  round 0.508 on Mech15: 0(0,0)
  rrect25% 5.5x1.5 smd: 1(-4.25,0) 2(4.25,0)
  silkscreen extent -5.84,-2.41 5.84,2.41, body extent -6.4,-2.41 6.4,2.42, height 4.29
TO220 [mil] "TO-220"
  rect 80x100 hole 39: 1(0,0)
  oval 80x100 hole 39: 2(100,0) 3(200,0)
  silkscreen extent -100,-76 300,130, body extent -95,-80 295,97, height 323
TO263-5 [mil] "TO263-5"
  rect 39.37x120 smd: 1(-140,-230) 2(-70,-230) 3(0,-230) 4(70,-230) 5(140,-230)
  rect 393.7x275.59 smd: 6(-5,230)
  silkscreen extent -180,-170 180,260, body extent -200,-242 200,310, height 180
"tro smd 0805" [mm]
  rect 1.2x1.4 smd: 1(-0.946,-0.061) 2(0.954,-0.061)
  silkscreen extent -1.75,-0.97 1.75,0.84, body extent -1.56,-0.76 1.44,0.64, height 0.53
"tu 0805" [mm] "Compoment SMD 80x50mil"
  rect 1.2x1.4 smd: 1(-0.946,-0.003) 2(0.954,-0.003)
  silkscreen extent -1.75,-0.89 1.75,0.89, body extent -1.01,-0.64 1.01,0.63, height 0.61
"tu hoa 8mm" [mm]
  rect 2.1x2.1 hole 0.9: 1(-1.75,0)
  round 2.1 hole 0.9: 2(1.75,0)
  silkscreen extent -4,-4 4,4, body extent -4.1,-4.07 4.1,4.13, height 13.81
"tu hoa 10mm" [mm]
  rect 2.1x2.1 hole 0.9: 1(-2.54,0)
  round 2.1 hole 0.9: 2(2.54,0)
  silkscreen extent -4.95,-4.96 4.93,4.92, body extent -5,-5 4.97,5, height 20.01
XH2.54M-4 [mm]
  rect 1.6x1.6 hole 0.8: 1(0,0)
  round 1.6 hole 0.8: 2(2.54,0) 3(5.08,0) 4(7.62,0)
  silkscreen extent -2.48,-2.26 10.1,3.46, body extent -2.48,-2.26 10.1,3.48, height 6.91

## Part data
AMS1: library part "AMS1117 SMD", "Dán", Chung_Loai=Dán, Don_Vi=Con, Ma_Hang=MH000596
AN1: library part "ANTEN SMA CONG", "Generic Antenna"
B1 H1 P1 P2 P3 P4 P5 P6 P7 P8: "Cắm", Chung_Loai=Cắm, Don_Vi=Con
  B1: Ma_Hang=MH003143, Ten_Linh_Kien="B0505S-1W SIP4 IC Converter DC-DC"
  H1: Ma_Hang=MH001285, Ten_Linh_Kien="Header 4P XH2.54-4P Đực Thẳng"
  P1 P4: Ma_Hang=MH000978, Ten_Linh_Kien="CON 8 2EDG5.08-8P 5.08MM ( Xanh Cong)"
  P2 P5: Ma_Hang=MH003589, Ten_Linh_Kien="CON 5 2EDG5.08-5P 5.08MM ( Xanh Cong)"
  P3: Ma_Hang=MH000760, Ten_Linh_Kien="CON 3 2EDG5.08-3P 5.08MM ( Xanh Cong)"
  P6: Ma_Hang=MH000979, Ten_Linh_Kien="CON 4 2EDG5.08-4P 5.08MM ( Xanh Cong)"
  P7 P8: Ma_Hang=MH000759, Ten_Linh_Kien="CON 2 2EDG5.08-2P 5.08MM ( Xanh Cong)"
C1 C2 C3 C4 C5 C6 C8 C9 C10 C11 C12 C15 C16 C19: library part "Tu 0805 104 50V 10%", "Dán", Chung_Loai=Dán, Don_Vi=Con, Ma_Hang=MH004551, So_Chan=2, Ten_Linh_Kien="Tụ 0805 104-100nF 10% 50V"
C7 C13: library part "Tu 0805 22pF 50V 10%", "Dán", Chung_Loai=Dán, Don_Vi=Con, Ma_Hang=MH004560, So_Chan=2, Ten_Linh_Kien="Tụ 0805 22P 10% 50V"
C14: library part "Tu Hoa 470uF 50V 10x17", "Cắm", Chung_Loai=Cắm, Don_Vi=Con, Ma_Hang=MH006866, So_Chan=2, Ten_Linh_Kien="Tụ Hóa 470uF 50V"
C17 C18: library part "Tu Hoa 470uF 16V 8x11", "Cắm", Chung_Loai=Cắm, Don_Vi=Con, Ma_Hang=MH006550, So_Chan=2, Ten_Linh_Kien="Tụ Hóa 470uF 16V 8x11MM"
COM1: library part DSB9F, "COM 9", PackageDocument=O, DatasheetDocument=1-Sep-1999, Gender=Receptacle, LatestRevisionDate=17-Jul-2002, LatestRevisionNote="Re-released for DXP Platform.", Orientation="Right Angle", PackageReference=788750, Positions=9, Published=15-Jun-2001, Publisher="Altium Limited"
D1: library part "Diode SS34 ( 1N5822 )", "Dán", Chung_Loai=Dán, Don_Vi=Con, Ma_Hang=MH002104, Ten_Linh_Kien="Diode SS34 3A 40V SMA ( 1N5822 SS34A)"
IC1: "Dual EIA-232 Driver/Receiver"
L2: library part "CUON CAM 100uH SMD", "Dán", Chung_Loai=Dán, Don_Vi=Con, Ten_Linh_Kien="Cuộn Cảm 100uH 7x7x4MM CD74"
L3: library part "LED 0805 Cam", "Dán", Chung_Loai=Dán, Don_Vi=Con, Ma_Hang=MH002328, Ten_Linh_Kien="LED 0805 Màu Cam ( Orange)"
Q1 Q2 Q3 Q4 Q5 Q6 Q7 Q8 Q9 Q10 Q11 Q12 Q13 Q14 Q15: library part "IRFZ44 DIP", "N-Channel Power MOSFET"
R1 R2 R3 R4 R9 R10 R11 R12 R13 R14 R15 R16 R17 R18 R19 R20 R21 R22 R23 R24 R25 R26 R27 R28 R29 R30 R31 R32 R34 R35 R36 R42 R43 R44 R51 R52 R57 R58 R63 R64 R69 R70 R71 R72 R73 R74 R77 R80: library part "Tro 0805 1% 10k", "Dán", Chung_Loai=Dán, Don_Vi=Con, Ma_Hang=MH005473, So_Chan=2, Ten_Linh_Kien="Trở 0805 1% 10k"
R5 R7: library part "Tro 0805 5% 20k", "Dán", Chung_Loai=Dán, Don_Vi=Con, Ma_Hang=MH005247, So_Chan=2, Ten_Linh_Kien="Trở 0805 5% 20k"
R6: library part "Tro 0805 5% 120R", "Dán", Chung_Loai=Dán, Don_Vi=Con, Ma_Hang=MH005253, So_Chan=2, Ten_Linh_Kien="Trở 0805 5% 120R"
R8 R83: library part "Tro 0805 5% 220R", "Dán", Chung_Loai=Dán, Don_Vi=Con, Ma_Hang=MH005259, So_Chan=2, Ten_Linh_Kien="Trở 0805 5% 220R"
R33 R37 R40 R45 R47 R49 R53 R55 R59 R61 R65 R67 R75 R78 R81: library part "Tro 0805 1% 680R", "Dán", Chung_Loai=Dán, Don_Vi=Con, Ma_Hang=MH005487, So_Chan=2, Ten_Linh_Kien="Trở 0805 1% 680R"
R38 R39 R41 R46 R48 R50 R54 R56 R60 R62 R66 R68 R76 R79 R82: library part "Tro 0805 5% 100R", "Dán", Chung_Loai=Dán, Don_Vi=Con, Ma_Hang=MH005251, So_Chan=2, Ten_Linh_Kien="Trở 0805 5% 100R"
S1: library part SW_THD_SPDT_On-On, "Switch THD vertical toggle SPDT", Contact Rating @ Voltage="0.25A @ 125VAC", Manufacturer 1="TE Connectivity", Manufacturer Part Number 1=SLS121PC04, Supplier Part Number 1=450-1598-ND, Circuit=SPDT, Mounting Type="PCB mount", SCDType=spec, Supplier 1=Digi-Key, Switch Function=On-On
U2 U4 U5 U6 U7 U8 U9 U10 U11 U12 U13 U14 U15 U16 U17 U18 U19 U20 U21 U22 U23 U24 U25 U26 U27 U29 U30: "Single Opto"
U28: library part "ESP8266 07", "ESP8266 07 16 Pin", IC=ESP8266-EX, Vendor=Ai-thinker
U31: "Dán", Chung_Loai=Dán, Don_Vi=Con, Ma_Hang=MH002362, Ten_Linh_Kien="LM2576HVS-5.0V BUCK 5V 3A TO263-5"
Y1: library part "Thach Anh 2 chan SMD", "Crystal For all Crystal 2pin."
BT1: Ma_Hang=MH001036, Ten="Nút Nhấn 2 Chân 3x6x2.5MM SMD"

## Free pads (board coordinates)
  round 5.5 hole 4: 2(3.988,4.064) 3(4,84.15) 4(119.101,83.998) 5(119.228,4.089)

## Nets (pads, with @x,y where several pads share a name; then routed paths per layer and width w, separated by ;. In a path a pad name is that pad's centre, name@x,y a point inside that pad or via, vN(x,y) a via of type N, cw(c..) or ccw(c..) an arc to the next point about the centre after c; other vN are vias at no path point)
3.3V: AMS1.2 AMS1.4 C3.1 C9.2 C10.2 C11.1 C12.2 C18.1 C19.1 H1.4 IC1.16 R9.2 R10.2 R13.2 R14.2 R17.2 R19.2 R21.2 R23.2 R24.2 R27.2 R29.2 R31.2 R69.1 R70.2 R72.2 R73.2 R83.1 U3.13 U3.19 U3.32 U3.48 U3.64 U28.8
5V: AMS1.3 B1.2 C6.2 C16.1 C17.1 L2.2 R1.2 R2.2 R3.2 R4.2 R7.2 U1.8 U31.4
5V_CL: B1.4 R34.1 R35.1 R36.1 R42.1 R43.1 R44.1 R51.1 R52.1 R57.1 R58.1 R63.1 R64.1 R74.1 R77.1 R80.1
24V: C14.1 C15.2 S1.3 U31.1
A: P8.2 R6.2 R7.1 U1.6
AI1: P3.3 U3.10
AI2: P3.2 U3.9
AI3: P3.1 U3.8
B: P8.1 R5.1 R6.1 U1.7 | length 0.2
  Top Layer w0.508: R6.1@112.222,31.551 112.323,31.451 R6.1
BOOT0: R8.1 U3.60
COM: P6.4 Q13.2 Q14.2 Q15.2
COM_RX: COM1.2 IC1.8
COM_TX: COM1.3 IC1.7
D_IN1: R9.1 U2.4 U3.50 | length 2.8
  Top Layer w0.508: R9.1 109.38,62.986 109.38,65.408 U2.4
D_IN2: R13.1 U3.51 U5.4 | length 2.8
  Top Layer w0.508: R13.1 104.313,62.992 104.313,65.402 U5.4
D_IN3: R17.1 U3.52 U7.4 | length 2.8
  Top Layer w0.508: R17.1 99.227,62.979 99.227,65.415 U7.4
D_IN4: R21.1 U3.53 U9.4 | length 2.8
  Top Layer w0.508: R21.1 94.138,62.962 94.138,65.462 94.158,65.481 94.188,65.481 U9.4
D_IN5: R27.1 U3.54 U12.4 | length 3
  Top Layer w0.508: R27.1 89.075,62.971 89.075,65.173 89.383,65.481 89.316,65.548 U12.4
D_IN6: R31.1 U3.55 U14.4 | length 2.8
  Top Layer w0.508: R31.1 83.986,62.955 83.986,65.439 U14.4
D_IN7: R10.1 U3.56 U4.4 | length 2.8
  Top Layer w0.508: R10.1 78.927,62.97 78.927,65.424 U4.4
D_IN8: R14.1 U3.57 U6.4 | length 2.8
  Top Layer w0.508: R14.1 73.858,62.973 73.858,65.421 U6.4
D_IN9: R19.1 U3.58 U8.4 | length 2.8
  Top Layer w0.508: R19.1 68.207,62.961 68.207,65.433 U8.4
D_IN10: R24.1 U3.59 U11.4 | length 2.8
  Top Layer w0.508: R24.1 63.148,63.016 63.148,65.378 U11.4
D_IN11: R23.1 U3.61 U10.4 | length 2.8
  Top Layer w0.508: R23.1 58,62.982 58,65.412 U10.4
D_IN12: R29.1 U3.62 U13.4 | length 2.8
  Top Layer w0.508: R29.1 52.891,62.986 52.891,65.408 U13.4
D_OUT1: R33.1 U3.20
D_OUT2: R45.1 U3.21
D_OUT3: R55.1 U3.22
D_OUT4: R61.1 U3.23
D_OUT5: R67.1 U3.24
D_OUT6: R40.1 U3.25
D_OUT7: R47.1 U3.26
D_OUT8: R53.1 U3.27
D_OUT9: R59.1 U3.28
D_OUT10: R65.1 U3.33
D_OUT11: R37.1 U3.34
D_OUT12: R49.1 U3.35
DE: R2.1 R3.1 U1.2 U1.3 U3.41
DI1: P1.8 U2.1 | length 6.6
  Top Layer w0.508: P1.8 109.52,80.525 U2.1
DI2: P1.7 U5.1 | length 7.4
  Top Layer w0.508: P1.7 103.942,80.179 103.942,78.085 103.403,77.546 103.403,75.689 104.458,74.634 U5.1
DI3: P1.6 U7.1 | length 7.3
  Top Layer w0.508: P1.6 99.261,80.578 99.261,78.636 98.4,77.775 98.4,75.594 99.36,74.634 U7.1
DI4: P1.5 U9.1 | length 7.4
  Top Layer w0.508: P1.5 94.234,80.571 94.234,78.537 93.294,77.597 93.294,75.594 94.255,74.634 U9.1
DI5: P1.4 U12.1 | length 7.3
  Top Layer w0.508: P1.4 89.027,80.504 89.027,78.613 88.29,77.876 88.29,75.543 89.2,74.634 U12.1
DI6: P1.3 U14.1 | length 7.4
  Top Layer w0.508: P1.3 84.074,80.571 84.074,78.588 83.134,77.648 83.134,75.594 84.095,74.634 U14.1
DI7: P1.2 U4.1 | length 7.2
  Top Layer w0.508: P1.2 78.943,80.58 78.943,78.562 78.207,77.826 78.207,75.478 79.051,74.634 U4.1
DI8: P1.1 U6.1 | length 7.3
  Top Layer w0.508: P1.1 73.812,80.53 73.812,78.537 73,77.724 73,75.62 73.985,74.634 U6.1
DI9: P2.5 U8.1 | length 7.1
  Top Layer w0.508: P2.5 68.199,80.555 68.199,78.715 67.564,78.08 67.564,75.391 68.321,74.634 U8.1
DI10: P2.4 U11.1 | length 7.2
  Top Layer w0.508: P2.4 62.992,80.428 62.992,78.969 62.459,78.435 62.459,75.493 63.317,74.634 U11.1
DI11: P2.3 U10.1 | length 7.3
  Top Layer w0.508: P2.3 58.166,80.52 58.166,78.499 57.328,77.661 57.328,75.476 58.136,74.668 U10.1
  Top Layer w1.016: P2.3@58.039,80.647 P2.3
DI12: P2.2 U13.1 | length 7.2
  Top Layer w0.508: P2.2 53.005,78.837 52.222,78.054 52.222,75.235 53.03,74.427 U13.1
DO1: P4.7 Q1.2
DO2: P4.6 Q4.2
DO3: P4.5 Q8.2
DO4: P4.4 Q10.2
DO5: P4.3 Q12.2
DO6: P4.2 Q3.2
DO7: P4.1 Q5.2
DO8: P5.5 Q7.2
DO9: P5.4 Q9.2
DO10: P5.3 Q11.2
DO11: P5.2 Q2.2
DO12: P5.1 Q6.2
EN: R72.1 U28.3
ESP_NRST: R69.2 U28.1
GND: AMS1.1 AN1.2 AN1.3 AN1.4 AN1.5 B1.1 BT1.1 C3.2 C4.2 C5.2 C6.1 C7.1 C8.2 C9.1 C10.1 C11.2 C12.1 C13.1 C14.2 C15.1 C16.2 C17.2 C18.2 C19.2 COM1.5 D1.1 H1.2 IC1.15 L3.2 P7.2 R5.2 R8.2 R71.1 U1.5 U2.3 U3.12 U3.18 U3.31 U3.47 U3.63 U4.3 U5.3 U6.3 U7.3 U8.3 U9.3 U10.3 U11.3 U12.3 U13.3 U14.3 U15.2 U16.2 U17.2 U18.2 U19.2 U20.2 U21.2 U22.2 U23.2 U24.2 U25.2 U26.2 U27.2 U28.9 U29.2 U30.2 U31.3 U31.5 U31.6
GND_CL: B1.3 U15.3 U16.3 U17.3 U18.3 U19.3 U20.3 U21.3 U22.3 U23.3 U24.3 U25.3 U26.3 U27.3 U29.3 U30.3
GND_DI: P2.1 R11.1 R12.1 R15.1 R16.1 R18.1 R20.1 R22.1 R25.1 R26.1 R28.1 R30.1 R32.1 | length 162.8
  Top Layer w0.508: R30.1 48.717,76.816 48.717,78.315 48.146,78.886 48.146,80.38 P2.1 47.925,83.256 48.854,84.185 55.626,84.185 ; R25.1 53.797,77.978 54.28,78.461 55.328,78.461 55.626,78.758 55.626,84.185 ; R26.1 58.928,76.867 58.928,78.13 59.258,78.461 60.401,78.461 60.706,78.765 60.706,84.109 60.782,84.185 ; R20.1 63.907,78.13 64.338,78.562 65.202,78.562 65.71,79.07 65.71,84.185 ; R16.1 69.52,78.079 69.85,78.41 70.485,78.41 70.866,78.791 70.866,84.16 70.841,84.185 ; R12.1 74.582,78.061 74.879,78.359 76.131,78.359 76.429,78.657 76.429,84.185 ; R32.1 79.731,76.878 79.731,78.105 80.061,78.435 81.211,78.435 81.509,78.733 81.509,84.185 ; R28.1 84.705,78.076 85.014,78.384 85.09,78.384 85.115,78.41 86.24,78.41 86.538,78.707 86.538,84.185 ; R22.1 89.767,78.036 90.065,78.334 91.338,78.334 91.796,78.791 91.796,84.16 91.821,84.185 ; R18.1 94.945,76.907 94.945,78.061 95.243,78.359 96.527,78.359 96.825,78.657 96.825,84.185 ; R15.1 99.891,77.971 100.33,78.41 101.531,78.41 101.829,78.707 101.829,84.084 101.727,84.185 ; R11.1 105.029,76.867 105.029,78.087 105.327,78.384 106.636,78.384 106.934,78.682 106.934,83.312 106.061,84.185 101.727,84.185 ; 55.626,84.185 60.782,84.185 ; 60.782,84.185 65.71,84.185 ; 65.71,84.185 70.841,84.185 ; 70.841,84.185 76.429,84.185 ; 76.429,84.185 81.509,84.185 ; 81.509,84.185 86.538,84.185 ; 86.538,84.185 91.821,84.185 ; 91.821,84.185 96.825,84.185 ; 96.825,84.185 101.727,84.185
GND_DO: P4.8 Q1.3 Q2.3 Q3.3 Q4.3 Q5.3 Q6.3 Q7.3 Q8.3 Q9.3 Q10.3 Q11.3 Q12.3
GPIO0: R73.1 U28.12
GPIO2: R70.1 U28.11
GPIO15: R71.2 U28.10
MCU_RX1: R1.1 U1.1 U3.43
MCU_RX2: U3.17 U28.16
MCU_RX3: IC1.9 U3.30
MCU_TX1: R4.1 U1.4 U3.42
MCU_TX2: U3.16 U28.15
MCU_TX3: IC1.10 U3.29
NetC1_1: C1.1 IC1.1
NetC1_2: C1.2 IC1.3
NetC2_1: C2.1 IC1.4
NetC2_2: C2.2 IC1.5
NetC4_1: C4.1 IC1.6
NetC5_1: C5.1 IC1.2
NetD1_2: D1.2 L2.1 U31.2
NetL3_1: L3.1 R83.2
NetP7_1: P7.1 S1.2
NetQ1_1: Q1.1 R39.2
NetQ2_1: Q2.1 R38.2
NetQ3_1: Q3.1 R41.2
NetQ4_1: Q4.1 R46.2
NetQ5_1: Q5.1 R48.2
NetQ6_1: Q6.1 R50.2
NetQ7_1: Q7.1 R54.2
NetQ8_1: Q8.1 R56.2
NetQ9_1: Q9.1 R60.2
NetQ10_1: Q10.1 R62.2
NetQ11_1: Q11.1 R66.2
NetQ12_1: Q12.1 R68.2
NetQ13_1: Q13.1 R76.2
NetQ14_1: Q14.1 R79.2
NetQ15_1: Q15.1 R82.2
NetR11_2: R11.2 U2.2 | length 2.8
  Top Layer w0.508: R11.2 106.916,76.727 106.916,74.111 U2.2
NetR12_2: R12.2 U4.2 | length 2.8
  Top Layer w0.508: R12.2 76.496,76.776 76.496,74.062 U4.2
NetR15_2: R15.2 U5.2 | length 2.8
  Top Layer w0.508: R15.2 101.855,76.727 101.855,74.111 U5.2
NetR16_2: R16.2 U6.2 | length 2.8
  Top Layer w0.508: R16.2 71.433,76.778 71.433,74.06 U6.2
NetR18_2: R18.2 U7.2 | length 2.8
  Top Layer w0.508: R18.2 96.775,76.746 96.775,74.093 U7.2
NetR20_2: R20.2 U8.2 | length 2.8
  Top Layer w0.508: U8.2 65.794,74.06 65.794,76.778 R20.2
NetR22_2: R22.2 U9.2 | length 2.8
  Top Layer w0.508: R22.2 91.691,76.767 91.691,74.071 U9.2
NetR25_2: R25.2 U10.2 | length 2.8
  Top Layer w0.508: U10.2 55.647,74.098 R25.2@55.647,76.74
  Top Layer w1.016: R25.2@55.647,76.74 R25.2
NetR26_2: R26.2 U11.2 | length 2.8
  Top Layer w0.508: R26.2 60.765,76.778 60.765,74.06 U11.2
NetR28_2: R28.2 U12.2 | length 2.8
  Top Layer w0.508: R28.2 86.633,76.764 86.633,74.075 U12.2
NetR30_2: R30.2 U13.2 | length 2.8
  Top Layer w0.508: U13.2 50.643,74.2 R30.2
NetR32_2: R32.2 U14.2 | length 2.7
  Top Layer w0.508: R32.2 81.549,76.785 81.549,74.053 U14.2
NetR33_2: R33.2 U16.1
NetR34_2: R34.2 R39.1 U16.4
NetR35_2: R35.2 R38.1 U15.4
NetR36_2: R36.2 R41.1 U17.4
NetR37_2: R37.2 U15.1
NetR40_2: R40.2 U17.1
NetR42_2: R42.2 R46.1 U18.4
NetR43_2: R43.2 R48.1 U19.4
NetR44_2: R44.2 R50.1 U20.4
NetR45_2: R45.2 U18.1
NetR47_2: R47.2 U19.1
NetR49_2: R49.2 U20.1
NetR51_2: R51.2 R54.1 U21.4
NetR52_2: R52.2 R56.1 U22.4
NetR53_2: R53.2 U21.1
NetR55_2: R55.2 U22.1
NetR57_2: R57.2 R60.1 U23.4
NetR58_2: R58.2 R62.1 U24.4
NetR59_2: R59.2 U23.1
NetR61_2: R61.2 U24.1
NetR63_2: R63.2 R66.1 U25.4
NetR64_2: R64.2 R68.1 U26.4
NetR65_2: R65.2 U25.1
NetR67_2: R67.2 U26.1
NetR74_2: R74.2 R76.1 U27.4
NetR75_2: R75.2 U27.1
NetR77_2: R77.2 R79.1 U29.4
NetR78_2: R78.2 U29.1
NetR80_2: R80.2 R82.1 U30.4
NetR81_2: R81.2 U30.1
NRST: BT1.2 C8.1 U3.7
OSC1: C7.2 U3.5 Y1.2
OSC2: C13.2 U3.6 Y1.1
PWM1: P6.3 Q13.3
PWM2: P6.2 Q14.3
PWM3: P6.1 Q15.3
PWM_1: R75.1 U3.38
PWM_2: R78.1 U3.39
PWM_3: R81.1 U3.40
SWCLK: H1.3 U3.49
SWDIO: H1.1 U3.46
pads on no net: AN1.1 COM1.1 COM1.4 COM1.6 COM1.7 COM1.8 COM1.9 COM1.10 COM1.11 IC1.11 IC1.12 IC1.13 IC1.14 S1.1 U3.1 U3.2 U3.3 U3.4 U3.11 U3.14 U3.15 U3.36 U3.37 U3.44 U3.45 U28.2 U28.4 U28.5 U28.6 U28.7 U28.13 U28.14 Y1.0

## Keep-outs
Keep-Out Layer:
  the board outline again, w0.025

## Silkscreen, mask and mechanical layers (free items; w line width, h text height)
Top Overlay:
  lines w0.127: 0,0.265 ccw(c0.254,0.265) 0.254,0.011 7.746,0.011 ccw(c7.746,0.265) 8,0.265 8,7.757 ccw(c7.746,7.757) 7.746,8.011 0.254,8.011 ccw(c0.254,7.757) 0,7.757 0,0.265 ; 0,80.265 ccw(c0.254,80.265) 0.254,80.011 7.746,80.011 ccw(c7.746,80.265) 8,80.265 8,87.757 ccw(c7.746,87.757) 7.746,88.011 0.254,88.011 ccw(c0.254,87.757) 0,87.757 0,80.265 ; 115,0.265 ccw(c115.254,0.265) 115.254,0.011 122.746,0.011 ccw(c122.746,0.265) 123,0.265 123,7.757 ccw(c122.746,7.757) 122.746,8.011 115.254,8.011 ccw(c115.254,7.757) 115,7.757 115,0.265 ; 115,80.265 ccw(c115.254,80.265) 115.254,80.011 122.746,80.011 ccw(c122.746,80.265) 123,80.265 123,87.757 ccw(c122.746,87.757) 122.746,88.011 115.254,88.011 ccw(c115.254,87.757) 115,87.757 115,80.265

## Text inside footprints (layer, text, board x,y; h text height)
COM1: Top Overlay "FMALE" at 27.858,2.386 h0.76 r180; Top Overlay "6" at 28.493,6.323 h1.02 r180; Top Overlay "9" at 20.111,6.323 h1.02 r180; Top Overlay "5" at 16.301,11.53 h1.02 r180; Top Overlay "1" at 32.049,11.53 h1.02 r180
U28: Mechanical 13 "ANTENNA AREA" at 0.642,23.339 h0.25 r90; Mechanical 13 "CUTOUT POLYGON" at 1.15,23.339 h0.25 r90